# Altium PCB R100.230.050.001-00 Filtr2.PcbDoc
Units mm, origin at the board's own origin, x right, y up, seen from the top; angles counter-clockwise.
Board outline 136 x 161 mm, 2 copper layers (Top, Bottom), stack 2.14 mm thick; 10 components, 5 nets, 38 pads, 315 vias.
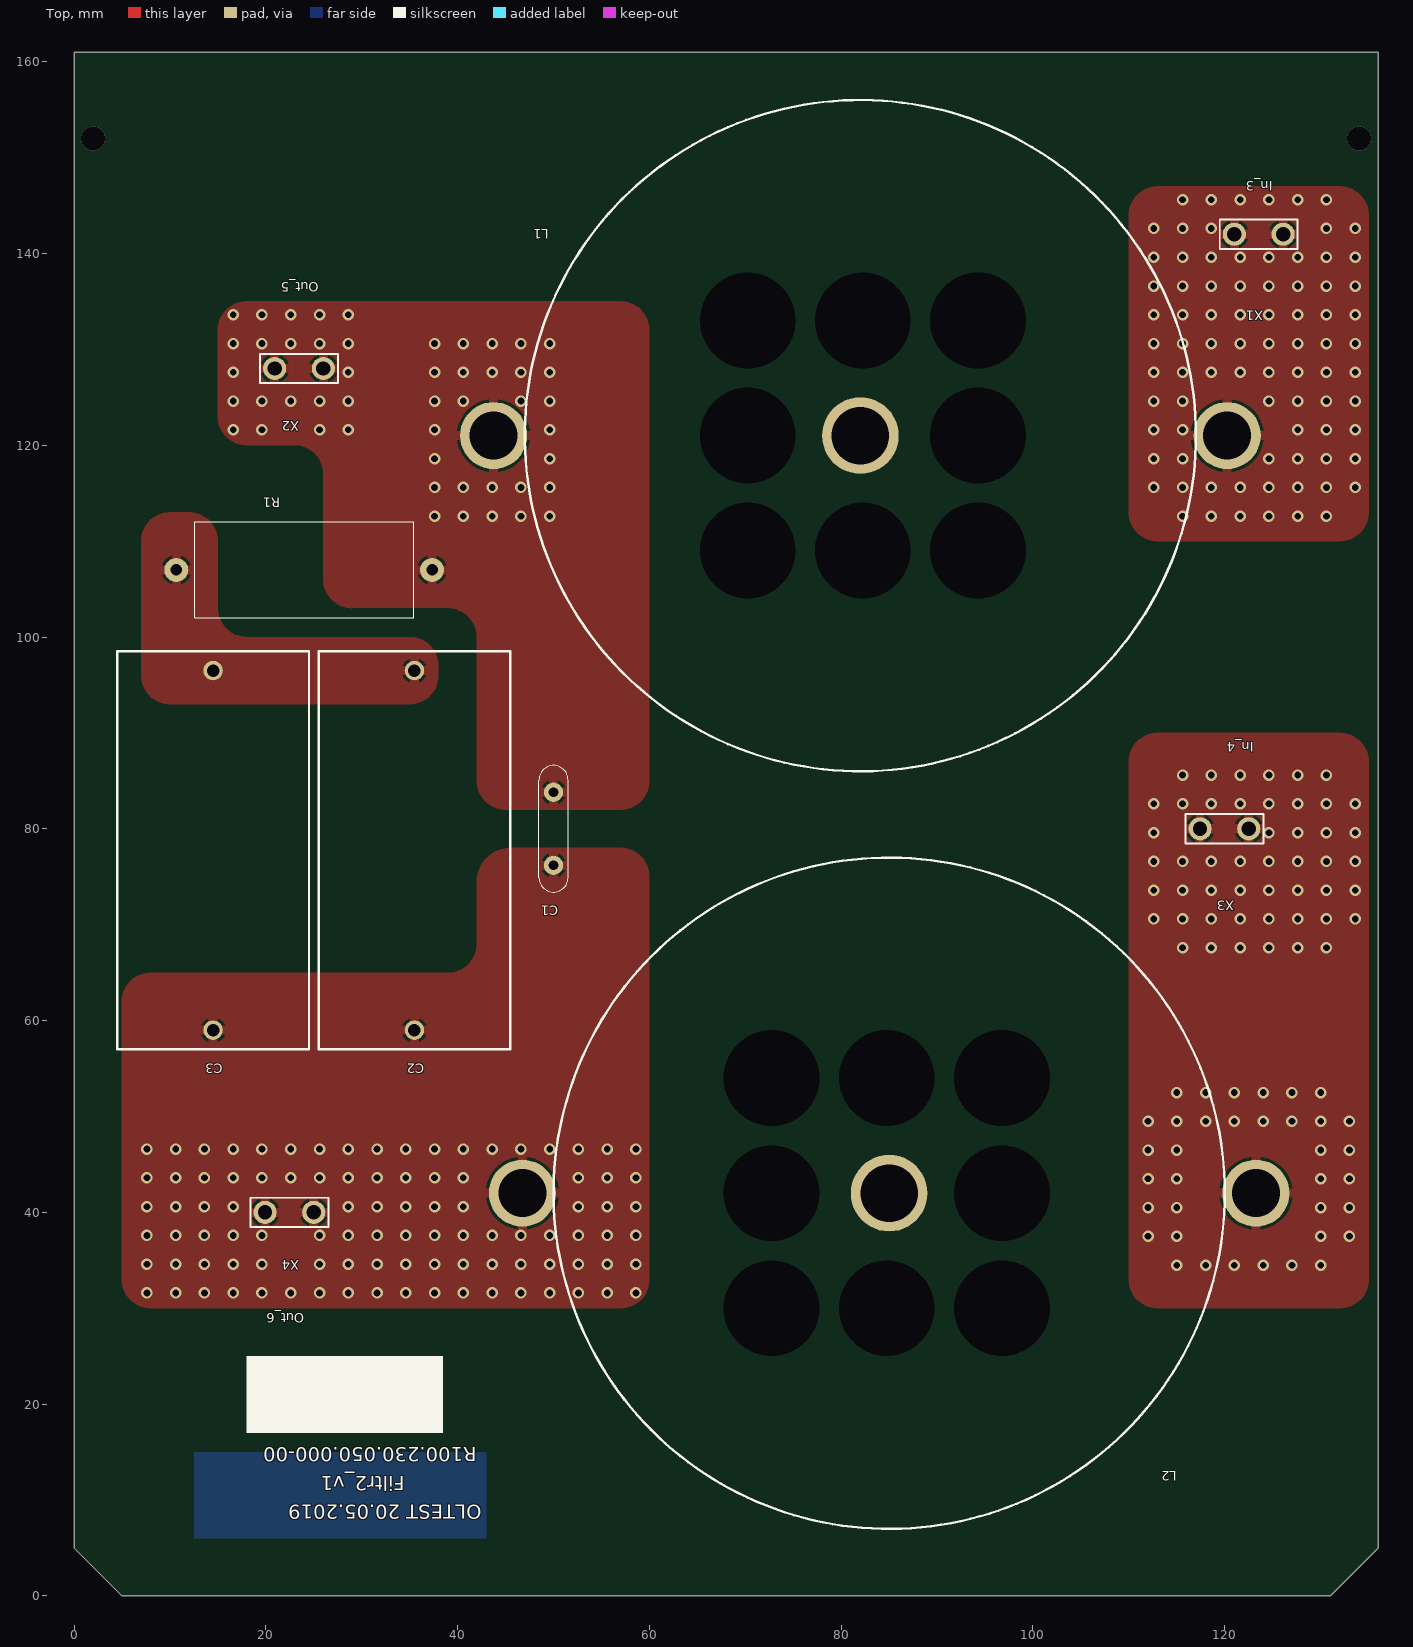
[diagram p0: Top view]
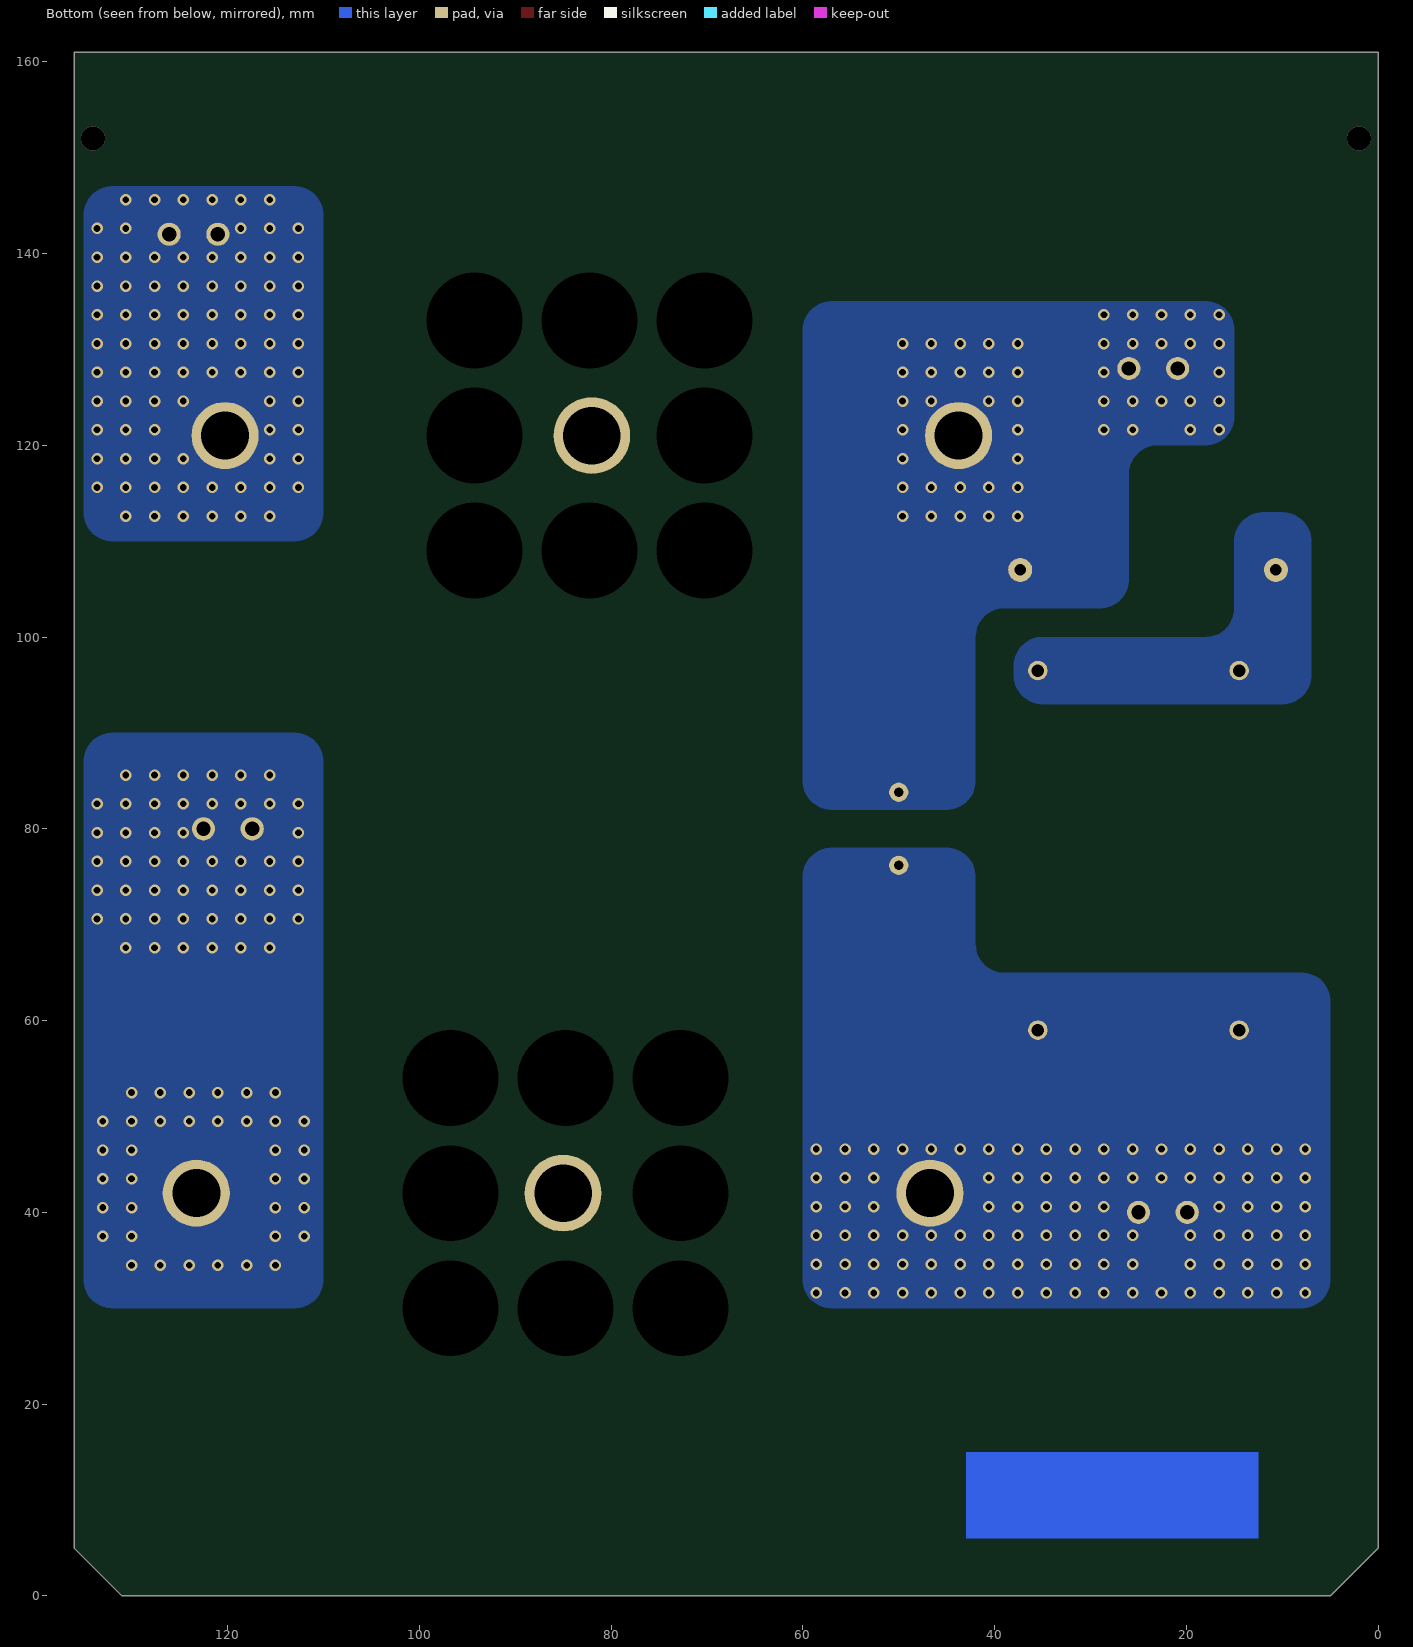
[diagram p1: Bottom view, seen from below]
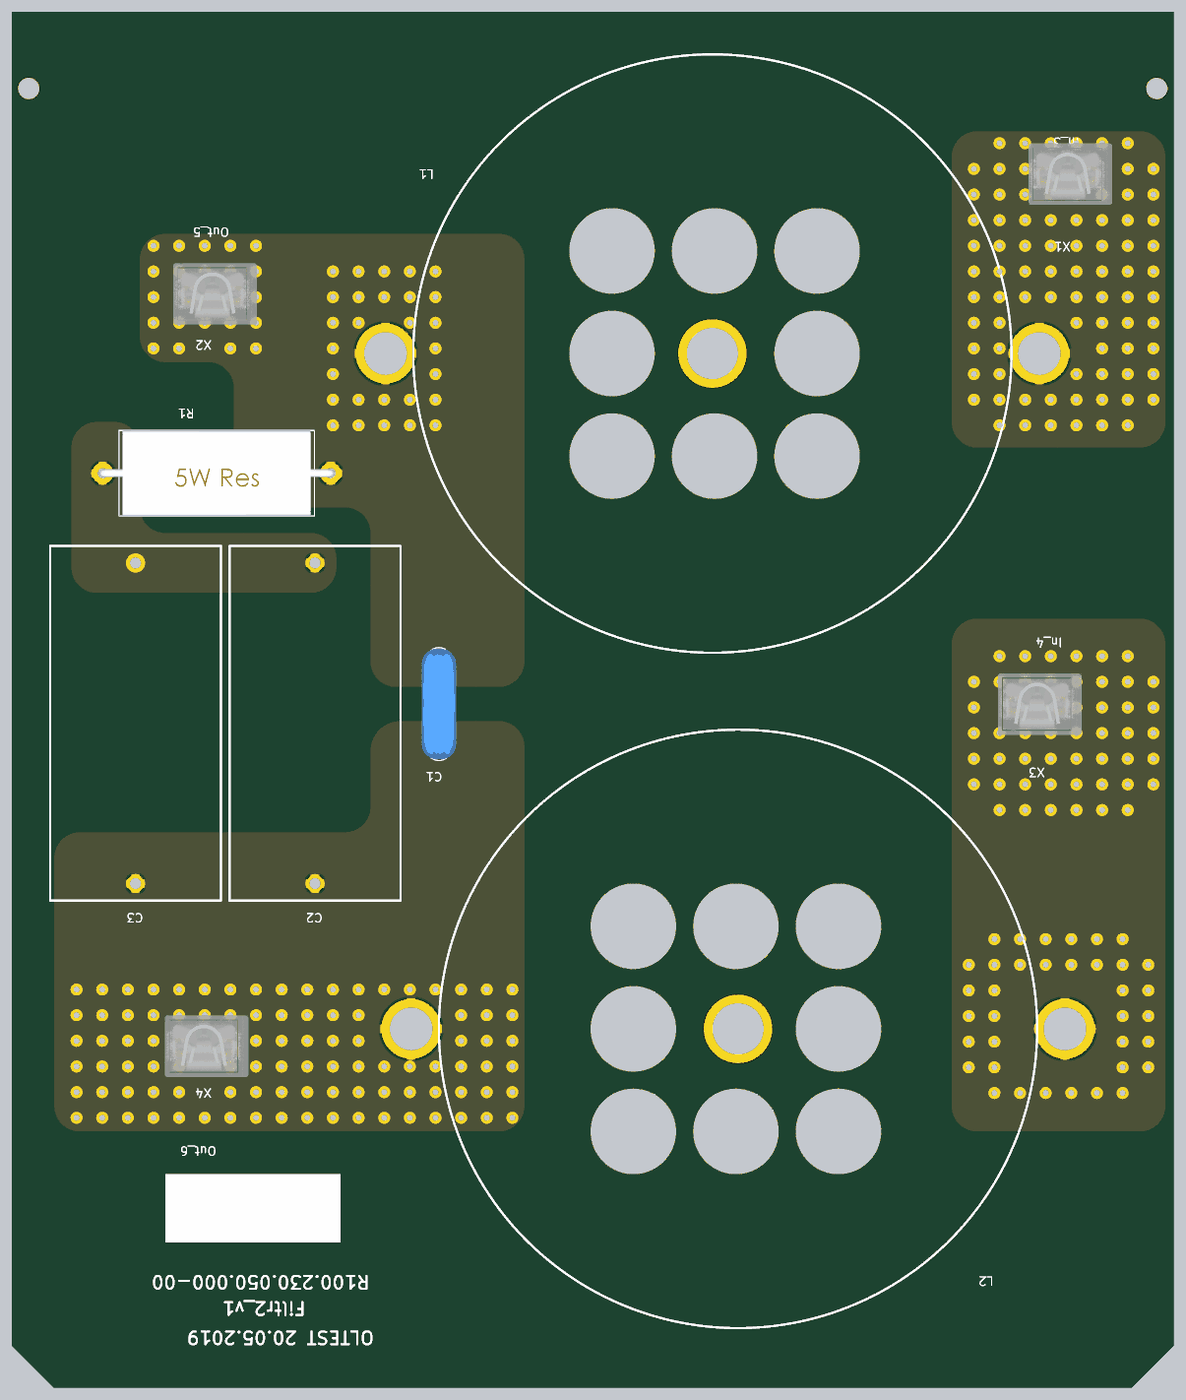
[diagram p2: 3D render of the assembled board from above, using the file's embedded part models]

## Layer stack, top to bottom
Top Solder: solder mask 0.0102, Solder Resist, Dk 3.5
Top: signal copper 0.07
Dielectric 1: dielectric 2, FR-4, Dk 4.8
Bottom: signal copper 0.07
Bottom Solder: solder mask 0.0102, Solder Resist, Dk 3.5

## Board outline
5,0 0,5 0,161 136,161 136,5 131,0

## Design rules (kind name [scope] priority, off if disabled: settings)
BoardOutlineClearance [All] p1: gap=0.5
Clearance Clearance_1 [(ObjectKind = 'Pad') And (Component = 'R10') And (Name = 'R10-2') vs InNet('VOUT-')] p1: gap=0.3
Clearance Clearance_Vout+- [InNet('VOUT+') or InNet('VOUT-')] p2: gap=1
Clearance Clearance_VOUT+-_4_+-Vin [InNet('VOUT+_4') or InNet('VOUT-_4') vs InNet('-VIN_200') or InNet('+VIN_200')] p3: gap=2
Clearance Clearance_VOUT+_4_VOUT-_4 [InNet('VOUT+_4') vs InNet('VOUT-_4')] p4: gap=2
Clearance Clearance_Vout_all [InNet('VOUT+_4') or InNet('VOUT-_4') or  InNet('VOUT+_3') or InNet('VOUT-_3') or InNet('VOUT+_2') or InNet('VOUT-_2') or InNet('VOUT+_1') or InNet('VOUT-_1') or InNet('VOUT+') or InNet('VOUT-')] p5: gap=1.2
Clearance Clearance_xp3_xp2_-Vin_200 [((ObjectKind = 'Pad') And (Component = 'XP3') And (Name = 'XP3-5')) or ((ObjectKind = 'Pad') And (Component = 'XP2') And (Name = 'XP2-5')) vs InNet('-VIN_200')] p6: gap=0.5
Clearance Clearance_+Vin_200_-Vin_200 [InNet('+VIN_200') vs InNet('-VIN_200')] p7: gap=2.2
Clearance Clearance_-Vin_200_All [InNet('-VIN_200') or InNet('+VIN_200')] p8: gap=1.2
Clearance [All] p9: gap=0.3 except(0.4: Arc-Poly Track-Poly SMDPad-Poly THPad-Poly Via-Poly Fill-Poly Poly-Poly)
ComponentClearance ComponentClearance_HS1 [(ObjectKind = 'Component') And (Name = 'HS1') or     (ObjectKind = 'Component') And (Name = 'HS2') or     (ObjectKind = 'Component') And (Name = 'HS3') or     (ObjectKind = 'Component') And (Name = 'HS4')] p1: gap=0.1 collisioncheckmode=3 verticalgap=0.1 showdistances=FALSE
ComponentClearance [All] p2: gap=0.254 collisioncheckmode=3 verticalgap=0.254 showdistances=FALSE
Height [All] p1: minheight=0 maxheight=63.5 prefheight=12.7
HoleSize [All] p1: absolutevalues=TRUE maxlimit=12 minlimit=0.025 maxpercent=80.000 minpercent=20.000
PolygonConnect PolygonConnect_shunt [(ObjectKind = 'Pad') And (Component = 'R10') And (Name = 'R10-1') or (ObjectKind = 'Pad') And (Component = 'R10') And (Name = 'R10-3')] p1: connectstyle=Direct reliefconductorwidth=0.254 reliefentries=4 polygonreliefangle="90 Angle" airgapwidth=0.254
PolygonConnect PolygonConnect_snnaber [((ObjectKind = 'Pad') And (Component = 'C3') And (Name = 'C3-2'))  or (ObjectKind = 'Poly') And (Net = 'NetC3_1')  or (ObjectKind = 'Pad') And (Component = 'R2') And (Name = 'R2-1')  or (ObjectKind = 'Pad') And (Component = 'VD2') And (Name = 'VD2-2')  or(ObjectKind = 'Pad') And (Component = 'C29') And (Name = 'C29-2') or (ObjectKind = 'Poly') And (Net = 'NetC29_1') or (ObjectKind = 'Pad') And (Component = 'VD6') And (Name = 'VD6-2') or (ObjectKind = 'Pad') And (Component = 'R8') And (Name = 'R8-1') or (ObjectKind = 'Poly') And (Net = 'N2') And (Name = 'Top Overlay-No Net')] p2: connectstyle=Direct reliefconductorwidth=0.254 reliefentries=4 polygonreliefangle="90 Angle" airgapwidth=0.254
PolygonConnect PolygonConnect_1 [IsStitchingVia] p3: connectstyle=Direct reliefconductorwidth=0.254 reliefentries=4 polygonreliefangle="90 Angle" airgapwidth=0.254
PolygonConnect PolygonConnect_bottom_fill [OnLayer('Bottom')] p4: connectstyle=Direct reliefconductorwidth=0.254 reliefentries=4 polygonreliefangle="90 Angle" airgapwidth=0.254
PolygonConnect PoligonConnect_top [OnLayer('Top')] p5: connectstyle=Relief reliefconductorwidth=1 reliefentries=4 polygonreliefangle="90 Angle" airgapwidth=0.3
RoutingVias [All] p1: holewidth=0.7 width=1.2 viastyle="Through Hole" minholewidth=0.5 minwidth=1 maxholewidth=12 maxwidth=15
SolderMaskExpansion [All] p1: expansion=0.102
Width Width_+Vin_200 [InNet('+VIN_200')] p1: maxlimit=50 minlimit=0.762 preferedwidth=10 checkconnectedcopper=TRUE
Width [InNet('No Net')] p2: maxlimit=0.254 minlimit=0.254 preferedwidth=0.254
27 further rules are at their usual default settings.

## Classes and differential pairs
component class Filtr2: C1 C2 C3 L2 R1 X1 X2 X3 X4

## Components (designator, comment, footprint, x,y, rotation, side; value= is the part's Value field where it differs from the comment)
C1 "10nF 300V" "C Y2 D13 7.5b" 50,80 r90 top
C2 "4.7uF 400VDC" MKP_W20_H39.5_L41.5_LS37.5 35.5,59 r90 top
C3 "4.7uF 400VDC" MKP_W20_H39.5_L41.5_LS37.5 14.5,59 r90 top
L1 "500/125uH 30A" "DROSS (500/125 UH 30 A)AMAK.671111.034" 120.25,121 r180 top
L2 "500/125uH 30A" "DROSS (500/125 UH 30 A)AMAK.671111.034" 46.75,42 r0 top
R1 "0.27" "PRW 5W 1050" 24,107 r0 top
X1 "63849-1" 63849-1+insulator(154719-1) 126.08,142 r180 top
X2 "63849-1" 63849-1+insulator(154719-1) 26,128 r180 top
X3 "63849-1" 63849-1+insulator(154719-1) 122.5,80 r180 top
X4 "63849-1" 63849-1+insulator(154719-1) 25,40 r180 top

## Footprints (in the part's own frame and the unit in brackets; to place one, negate y for a bottom-side part, rotate by r counter-clockwise, add the part's x,y. Pads: shape width x height; smd on the part's side, far side on the other; paste and mask are expansions set on the pad)
63849-1+insulator(154719-1) [mil]
  round 95 hole 59.06: 1(0,0) 2(200,0)
  silkscreen extent -60,-60 260,60, body extent -106,-141 279,142, height 955
"C Y2 D13 7.5b" [mm]
  round 2 hole 1: 1(-3.81,0) 2(3.81,0)
  silkscreen extent -6.6,-1.52 6.6,1.52, body extent -6.49,-2 6.49,2, height 15.5
"DROSS (500/125 UH 30 A)AMAK.671111.034" [mm]
  round 0 hole 10: 0(26,12) 0(26,0) 0(26,-12) 0(38,-12) 0(38,12) 0(50,-12) 0(50,0) 0(50,12)
  round 7 hole 5: 1(0,0) 2(76.5,0)
  round 8 hole 6: 3(38.25,0)
  silkscreen extent 3.25,-35 73.25,35, body extent -2.67,-34.6 72.85,34.6, height 37
MKP_W20_H39.5_L41.5_LS37.5 [mil]
  round 80 hole 51.18: 1(0,0) 2(1476.38,0)
  silkscreen extent -79,-394 1555,394, body extent -84,-399 1560,399, height 1555
"PRW 5W 1050" [mm]
  round 2.5 hole 1.2: 1(-13.335,0) 2(13.335,0)
  silkscreen extent -11.43,-5 11.43,5, body extent -13.79,-5 13.78,5, height 10.01

## Part data
C1: library part "C X1Y2 10nF D13 LS7.5", "Ceramic D=14 LS=7.5 300VAC X1Y2"
C2 C3: library part "MKP1 4.7uF 10% 400VDC", "Polypropelene W20 H39.5 L41.5 LS37.5 400VDC 10%"
L1 L2: library part "Dross 500/125uH 30A 捞朗.671111.034", "500/125uH 30A  (Core T250-52 X1)"
R1: library part "PRW 0.27 5W +-5%", "蔓忸漤铋 PRW 5W 0R27 +-5%"
X1 X2 X3 X4: "PCB, 6.3õ0.8, hole"

## Via types
v1: diameter 1.2/1.2 (per signal layer), hole 0.7, Top to Bottom, 313 vias
v2: diameter 2.5, hole 2.5, Top to Bottom, 2 vias

## Nets (pads, with @x,y where several pads share a name; then routed paths per layer and width w, separated by ;. In a path a pad name is that pad's centre, name@x,y a point inside that pad or via, vN(x,y) a via of type N, cw(c..) or ccw(c..) an arc to the next point about the centre after c; other vN are vias at no path point)
N6: C2.2 C3.2 R1.1
NetC1_1: C1.1 C2.1 C3.1 L2.1 X4.1 X4.2
  other v1: 7.6,31.6 10.6,31.6 13.6,31.6 16.6,31.6 19.6,31.6 22.6,31.6 25.6,31.6 28.6,31.6 31.6,31.6 34.6,31.6 37.6,31.6 40.6,31.6 43.6,31.6 46.6,31.6 49.6,31.6 52.6,31.6 55.6,31.6 58.6,31.6 7.6,34.6 10.6,34.6 13.6,34.6 16.6,34.6 19.6,34.6 25.6,34.6 28.6,34.6 31.6,34.6 34.6,34.6 37.6,34.6 40.6,34.6 43.6,34.6 46.6,34.6 49.6,34.6 52.6,34.6 55.6,34.6 58.6,34.6 7.6,37.6 10.6,37.6 13.6,37.6 16.6,37.6 19.6,37.6 25.6,37.6 28.6,37.6 31.6,37.6 34.6,37.6 37.6,37.6 40.6,37.6 43.6,37.6 46.6,37.6 49.6,37.6 52.6,37.6 55.6,37.6 58.6,37.6 7.6,40.6 10.6,40.6 13.6,40.6 16.6,40.6 28.6,40.6 31.6,40.6 34.6,40.6 37.6,40.6 40.6,40.6 52.6,40.6 55.6,40.6 58.6,40.6 7.6,43.6 10.6,43.6 13.6,43.6 16.6,43.6 19.6,43.6 22.6,43.6 25.6,43.6 28.6,43.6 31.6,43.6 34.6,43.6 37.6,43.6 40.6,43.6 52.6,43.6 55.6,43.6 58.6,43.6 7.6,46.6 10.6,46.6 13.6,46.6 16.6,46.6 19.6,46.6 22.6,46.6 25.6,46.6 28.6,46.6 31.6,46.6 34.6,46.6 37.6,46.6 40.6,46.6 43.6,46.6 46.6,46.6 49.6,46.6 52.6,46.6 55.6,46.6 58.6,46.6
NetC1_2: C1.2 L1.2 R1.2 X2.1 X2.2
  other v1: 37.6,112.6 40.6,112.6 43.6,112.6 46.6,112.6 49.6,112.6 37.6,115.6 40.6,115.6 43.6,115.6 46.6,115.6 49.6,115.6 37.6,118.6 49.6,118.6 16.6,121.6 19.6,121.6 25.6,121.6 28.6,121.6 37.6,121.6 49.6,121.6 16.6,124.6 19.6,124.6 22.6,124.6 25.6,124.6 28.6,124.6 37.6,124.6 40.6,124.6 46.6,124.6 49.6,124.6 16.6,127.6 28.6,127.6 37.6,127.6 40.6,127.6 43.6,127.6 46.6,127.6 49.6,127.6 16.6,130.6 19.6,130.6 22.6,130.6 25.6,130.6 28.6,130.6 37.6,130.6 40.6,130.6 43.6,130.6 46.6,130.6 49.6,130.6 16.6,133.6 19.6,133.6 22.6,133.6 25.6,133.6 28.6,133.6
NetL1_1: L1.1 X1.1 X1.2
  other v1: 115.6,112.6 118.6,112.6 121.6,112.6 124.6,112.6 127.6,112.6 130.6,112.6 112.6,115.6 115.6,115.6 118.6,115.6 121.6,115.6 124.6,115.6 127.6,115.6 130.6,115.6 133.6,115.6 112.6,118.6 115.6,118.6 124.6,118.6 127.6,118.6 130.6,118.6 133.6,118.6 112.6,121.6 115.6,121.6 127.6,121.6 130.6,121.6 133.6,121.6 112.6,124.6 115.6,124.6 124.6,124.6 127.6,124.6 130.6,124.6 133.6,124.6 112.6,127.6 115.6,127.6 118.6,127.6 121.6,127.6 124.6,127.6 127.6,127.6 130.6,127.6 133.6,127.6 112.6,130.6 115.6,130.6 118.6,130.6 121.6,130.6 124.6,130.6 127.6,130.6 130.6,130.6 133.6,130.6 112.6,133.6 115.6,133.6 118.6,133.6 121.6,133.6 124.6,133.6 127.6,133.6 130.6,133.6 133.6,133.6 112.6,136.6 115.6,136.6 118.6,136.6 121.6,136.6 124.6,136.6 127.6,136.6 130.6,136.6 133.6,136.6 112.6,139.6 115.6,139.6 118.6,139.6 121.6,139.6 124.6,139.6 127.6,139.6 130.6,139.6 133.6,139.6 112.6,142.6 115.6,142.6 118.6,142.6 130.6,142.6 133.6,142.6 115.6,145.6 118.6,145.6 121.6,145.6 124.6,145.6 127.6,145.6 130.6,145.6
NetL2_2: L2.2 X3.1 X3.2
  other v1: 115,34.5 118,34.5 121,34.5 124,34.5 127,34.5 130,34.5 112,37.5 115,37.5 130,37.5 133,37.5 112,40.5 115,40.5 130,40.5 133,40.5 112,43.5 115,43.5 130,43.5 133,43.5 112,46.5 115,46.5 130,46.5 133,46.5 112,49.5 115,49.5 118,49.5 121,49.5 124,49.5 127,49.5 130,49.5 133,49.5 115,52.5 118,52.5 121,52.5 124,52.5 127,52.5 130,52.5 115.6,67.6 118.6,67.6 121.6,67.6 124.6,67.6 127.6,67.6 130.6,67.6 112.6,70.6 115.6,70.6 118.6,70.6 121.6,70.6 124.6,70.6 127.6,70.6 130.6,70.6 133.6,70.6 112.6,73.6 115.6,73.6 118.6,73.6 121.6,73.6 124.6,73.6 127.6,73.6 130.6,73.6 133.6,73.6 112.6,76.6 115.6,76.6 118.6,76.6 121.6,76.6 124.6,76.6 127.6,76.6 130.6,76.6 133.6,76.6 112.6,79.6 124.6,79.6 127.6,79.6 130.6,79.6 133.6,79.6 112.6,82.6 115.6,82.6 118.6,82.6 121.6,82.6 124.6,82.6 127.6,82.6 130.6,82.6 133.6,82.6 115.6,85.6 118.6,85.6 121.6,85.6 124.6,85.6 127.6,85.6 130.6,85.6
pads on no net: L1.0 L1.3 L2.0 L2.3
copper on no net:
  other v2: 2,152 134,152

## Polygon pours and split planes (outlines as drawn)
NetL1_1 on Top "NetL1_1" (solid, pour order 208): 110,144 110,113 ccw(c113,113) 113,110 132,110 ccw(c132,113) 135,113 135,144 ccw(c132,144) 132,147 113,147 ccw(c113,144)
NetL2_2 on Top "NetL1_1" (solid, pour order 210): 110,33 110,87 cw(c113,87) 113,90 132,90 cw(c132,87) 135,87 135,33 cw(c132,33) 132,30 113,30 cw(c113,33)
NetC1_2 on Top "NetL1_1" (solid, pour order 218): 15,132 15,123 ccw(c18,123) 18,120 23,120 cw(c23,117) 26,117 26,106 ccw(c29,106) 29,103 39,103 cw(c39,100) 42,100 42,85 ccw(c45,85) 45,82 57,82 ccw(c57,85) 60,85 60,132 ccw(c57,132) 57,135 18,135 ccw(c18,132)
NetC1_1 on Top "NetL1_1" (solid, pour order 220): 5,62 5,33 ccw(c8,33) 8,30 57,30 ccw(c57,33) 60,33 60,75 ccw(c57,75) 57,78 45.5,78 ccw(c45.5,74.5) 42,74.5 42,68 cw(c39,68) 39,65 8,65 ccw(c8,62)
N6 on Top "NetL1_1" (solid, pour order 226): 7,110 7,96 ccw(c10,96) 10,93 35,93 ccw(c35,96) 38,96 38,97 ccw(c35,97) 35,100 18,100 cw(c18,103) 15,103 15,110 ccw(c12,110) 12,113 10,113 ccw(c10,110)
NetL2_2 on Bottom "NetL1_1" (solid, pour order 212): 110,87 110,33 ccw(c113,33) 113,30 132,30 ccw(c132,33) 135,33 135,87 ccw(c132,87) 132,90 113,90 ccw(c113,87)
NetL1_1 on Bottom "NetL1_1" (solid, pour order 214): 110,144 110,113 ccw(c113,113) 113,110 132,110 ccw(c132,113) 135,113 135,144 ccw(c132,144) 132,147 113,147 ccw(c113,144)
NetC1_2 on Bottom "NetL1_1" (solid, pour order 216): 15,132 15,123 ccw(c18,123) 18,120 23,120 cw(c23,117) 26,117 26,106 ccw(c29,106) 29,103 39,103 cw(c39,100) 42,100 42,85 ccw(c45,85) 45,82 57,82 ccw(c57,85) 60,85 60,132 ccw(c57,132) 57,135 18,135 ccw(c18,132)
NetC1_1 on Bottom "NetL1_1" (solid, pour order 222): 5,62 5,33 ccw(c8,33) 8,30 57,30 ccw(c57,33) 60,33 60,75 ccw(c57,75) 57,78 45,78 ccw(c45,75) 42,75 42,68 cw(c39,68) 39,65 8,65 ccw(c8,62)
N6 on Bottom "NetL1_1" (solid, pour order 224): 38,97 38,96 cw(c35,96) 35,93 10,93 cw(c10,96) 7,96 7,110 cw(c10,110) 10,113 12,113 cw(c12,110) 15,110 15,103 ccw(c18,103) 18,100 35,100 cw(c35,97)

## Other copper
Bottom:
  rectangle: 12.5,6 43,15

## Silkscreen, mask and mechanical layers (free items; w line width, h text height)
Top Overlay:
  rectangle: 18,17 38.5,25
  text "In_3" at 125,147.5 h1 r180
  text "Out_5" at 25.5,137 h1 r180
  text "In_4" at 123,89 h1 r180
  text "Out_6" at 24,29.5 h1 r180
  text "R100.230.050.000-00" at 41.996,15.5 h1.5 r180
  text "Filtr2_v1" at 34.5,12.5 h1.5 r180
  text "OLTEST 20.05.2019" at 42.5,9.5 h1.5 r180
Bottom Solder:
  text "R100.230.050.001-00" at 13.311,14 h1.5 r180
  text "Filtr2_v1" at 16.5,11 h1.5 r180
Board:
  the board outline again, w0.254